# EAGLE board CT_schematic (EAGLE 7.6.0)

Size 100 x 80 mm. Coordinates in mm from the lower left corner, seen from the top.
Outline: 0,0 100,0 100,80 0,80 0,0
Copper layers (1*16): Top 0.035mm / dielectric 1.5mm / Bottom 0.035mm
Design rules "default": minimum track width 10mil, minimum drill 24mil, track to track 8mil, track to pad 8mil, pad to pad 8mil, via to via 8mil, smd to smd 8mil, copper to edge 40mil, drill to drill 8mil, minimum pad ring 10mil, minimum via ring 8mil, stop-mask expansion 4mil, vias tented up to drill 0mil, thermal gap 10mil

## Footprints (pad centres in the part's own frame; a part is rotated, then mirrored left to right if it is on the bottom)
C0603 = smd 0.8 x 0.8: 1 -0.762,0; 2 0.762,0
C0402 = smd 0.5 x 0.5: 1 -0.508,0; 2 0.508,0
C0805 = smd 1.2 x 1.3: 1 -1.016,0; 2 1.016,0
C1206 = smd 1.3 x 1.6: 1 -1.524,0; 2 1.524,0
L0603 = smd 0.8 x 0.8: 1 -0.762,0; 2 0.762,0
L0806 = smd 1.016 x 1.524: 1 -0.889,0; 2 0.889,0
R0603 = smd 0.8 x 0.8: 1 -0.762,0; 2 0.762,0
LQFP144 = smd 0.35 x 1.35: 1 -8.75,-10.625; 2 -8.25,-10.625; 3 -7.75,-10.625; 4 -7.25,-10.625; 5 -6.75,-10.625; 6 -6.25,-10.625; 7 -5.75,-10.625; 8 -5.25,-10.625; 9 -4.75,-10.625; 10 -4.25,-10.625; 11 -3.75,-10.625; 12 -3.25,-10.625; 13 -2.75,-10.62; 14 -2.25,-10.625; 15 -1.75,-10.625; 16 -1.25,-10.625; 17 -0.75,-10.625; 18 -0.25,-10.625; 19 0.25,-10.625; 20 0.75,-10.625; 21 1.25,-10.625; 22 1.75,-10.625; 23 2.25,-10.625; 24 2.75,-10.62; 25 3.25,-10.625; 26 3.75,-10.625; 27 4.25,-10.625; 28 4.75,-10.625; 29 5.25,-10.625; 30 5.75,-10.625; 31 6.25,-10.625; 32 6.75,-10.625; 33 7.25,-10.625; 34 7.75,-10.625; 35 8.25,-10.625; 36 8.75,-10.625; 73 8.75,10.625; 74 8.25,10.625; 75 7.75,10.625; 76 7.25,10.625; 77 6.75,10.625; 78 6.25,10.625; 79 5.75,10.625; 80 5.25,10.625; 81 4.75,10.625; 82 4.25,10.625; 83 3.75,10.625; 84 3.25,10.625; 85 2.75,10.625; 86 2.25,10.625; 87 1.75,10.625; 88 1.25,10.625; 89 0.75,10.625; 90 0.25,10.625; 91 -0.25,10.625; 92 -0.75,10.625; 93 -1.25,10.625; 94 -1.75,10.625; 95 -2.25,10.625; 96 -2.75,10.625; 97 -3.25,10.625; 98 -3.75,10.625; 99 -4.25,10.625; 100 -4.75,10.625; 101 -5.25,10.625; 102 -5.75,10.625; 103 -6.25,10.625; 104 -6.75,10.625; 105 -7.25,10.625; 106 -7.75,10.625; 107 -8.25,10.625; 108 -8.75,10.625 | smd 1.35 x 0.35: 37 10.625,-8.75; 38 10.625,-8.25; 39 10.625,-7.75; 40 10.625,-7.25; 41 10.625,-6.75; 42 10.625,-6.25; 43 10.625,-5.75; 44 10.625,-5.25; 45 10.625,-4.75; 46 10.625,-4.25; 47 10.625,-3.75; 48 10.625,-3.25; 49 10.625,-2.75; 50 10.625,-2.25; 51 10.625,-1.75; 52 10.625,-1.25; 53 10.625,-0.75; 54 10.625,-0.25; 55 10.625,0.25; 56 10.625,0.75; 57 10.625,1.25; 58 10.625,1.75; 59 10.625,2.25; 60 10.625,2.75; 61 10.625,3.25; 62 10.625,3.75; 63 10.625,4.25; 64 10.625,4.75; 65 10.625,5.25; 66 10.625,5.75; 67 10.625,6.25; 68 10.625,6.75; 69 10.625,7.25; 70 10.625,7.75; 71 10.625,8.25; 72 10.625,8.75; 109 -10.625,8.75; 110 -10.625,8.25; 111 -10.625,7.75; 112 -10.625,7.25; 113 -10.625,6.75; 114 -10.625,6.25; 115 -10.625,5.75; 116 -10.625,5.25; 117 -10.625,4.75; 118 -10.625,4.25; 119 -10.625,3.75; 120 -10.625,3.25; 121 -10.625,2.75; 122 -10.625,2.25; 123 -10.625,1.75; 124 -10.625,1.25; 125 -10.625,0.75; 126 -10.625,0.25; 127 -10.625,-0.25; 128 -10.625,-0.75; 129 -10.625,-1.25; 130 -10.625,-1.75; 131 -10.625,-2.25; 132 -10.625,-2.75; 133 -10.625,-3.25; 134 -10.625,-3.75; 135 -10.625,-4.25; 136 -10.625,-4.75; 137 -10.625,-5.25; 138 -10.625,-5.75; 139 -10.625,-6.25; 140 -10.625,-6.75; 141 -10.625,-7.25; 142 -10.625,-7.75; 143 -10.625,-8.25; 144 -10.625,-8.75
ARDUCAM = drill 1 pad 1.8 square: 1 0,0 | drill 1 pad 1.8: 2 0,2.54; 3 2.54,0; 4 2.54,2.54; 5 5.08,0; 6 5.08,2.54; 7 7.62,0; 8 7.62,2.54; 9 10.16,0; 10 10.16,2.54; 11 12.7,0; 12 12.7,2.54; 13 15.24,0; 14 15.24,2.54; 15 17.78,0; 16 17.78,2.54; 17 20.32,0; 18 20.32,2.54; 19 22.86,0; 20 22.86,2.54
DFN-10 = smd 0.965 x 0.305: 1 -1.321,1; 2 -1.321,0.5; 3 -1.321,0; 4 -1.321,-0.5; 5 -1.321,-1; 6 1.321,-1; 7 1.321,-0.5; 8 1.321,0; 9 1.321,0.5; 10 1.321,1
TDFN-8/6MM = smd 0.3 x 0.75: 1 0,0; 2 0.5,0; 3 1,0; 4 1.5,0; 5 1.5,3; 6 1,3; 7 0.5,3; 8 0,3
FCI_10118193-0001LF = smd 0.4 x 1.35: 1 -1.3,2.675; 2 -0.65,2.675; 3 0,2.675; 4 0.65,2.675; 5 1.3,2.675 | smd 1.6 x 1.4: 6 -3.2,2.45; 7 3.2,2.45 | smd 1.9 x 1.9: 8 -1.2,0; 9 1.2,0 | hole 0.5: -3.3,0; 3.3,0
SOT143B = smd 1 x 0.7: 1 -0.75,-1 | smd 0.6 x 0.7: 2 0.95,-1; 3 0.95,1; 4 -0.95,1
ABLS-25.000MHZ-B2F-T = smd 5.6 x 2.8: 1 -3.81,0; 2 5.69,0
ASEK = smd 1.4 x 1: 1 -1.1,-0.8; 2 1.1,-0.8; 3 1.1,0.8; 4 -1.1,0.8
ASFL1 = smd 1.7 x 1.5: 1 -1.27,-1.1; 2 1.27,-1.1; 3 1.27,1.1; 4 -1.27,1.1
TSOT-23-5 = smd 1.3 x 0.62: 1 -1.31,0.95; 2 -1.31,0; 3 -1.31,-0.95; 4 1.31,-0.95; 5 1.31,0.95
DFN8_2X3MC = smd 0.813 x 0.305: 1 -1.398,0.75; 2 -1.398,0.25; 3 -1.398,-0.25; 4 -1.398,-0.75; 5 1.398,-0.75; 6 1.398,-0.25; 7 1.398,0.25; 8 1.398,0.75 | smd 1.753 x 1.549: 9 0,0
JST-2-SMD = smd 1 x 4.6: 1 -1,-3.7; 2 1,-3.7 | smd 1.6 x 3.4: NC1 -3.4,1.5; NC2 3.4,1.5
SON-6 = smd 0.55 x 0.3: 1 -0.355,0.5 | smd 0.52 x 0.3: 2 -0.37,0; 3 -0.37,-0.5; 4 0.37,-0.5; 5 0.37,0; 6 0.37,0.5
SW_4-1437565-2 = smd 1.4 x 2.1: 1 -2.23,4.55; 2 -2.23,-4.55; 3 2.23,4.55; 4 2.23,-4.55
LGM67K-G1J2-24-Z = smd 0.8 x 1.4: A -2,0; C 0,0
NC7SZ125M5X = smd 1.3 x 0.7: 1 -1.3,0.95; 2 -1.3,0; 3 -1.3,-0.95; 4 1.3,-0.95; 5 1.3,0.95

## Placement (x,y rotation side)
C1  1e-06  [C0603]  -50.8,55.88 0 top  (outside the outline)
C2  1e-07  [C0603]  -54.61,55.88 0 top  (outside the outline)
C3  1e-07  [C0603]  -58.42,55.88 0 top  (outside the outline)
C4  1e-07  [C0603]  -62.23,55.88 0 top  (outside the outline)
C5  1e-07  [C0603]  -66.04,55.88 0 top  (outside the outline)
C6  1e-07  [C0603]  -15.24,60.96 0 top  (outside the outline)
C7  1e-07  [C0603]  -19.05,60.96 0 top  (outside the outline)
C8  1e-07  [C0603]  -22.86,60.96 0 top  (outside the outline)
C9  1e-07  [C0603]  -26.67,60.96 0 top  (outside the outline)
C10  1e-07  [C0603]  -30.48,60.96 0 top  (outside the outline)
C11  1e-07  [C0603]  -34.29,60.96 0 top  (outside the outline)
C12  1e-07  [C0603]  -38.1,60.96 0 top  (outside the outline)
C13  1e-07  [C0603]  -41.91,60.96 0 top  (outside the outline)
C14  4.7e-06  [C0603]  -39.37,55.88 0 top  (outside the outline)
C15  2.2e-06  [C0603]  -43.18,55.88 0 top  (outside the outline)
C16  2.2e-06  [C0603]  -46.99,55.88 0 top  (outside the outline)
C17  1e-08  [C0603]  -45.72,60.96 0 top  (outside the outline)
C18  1e-06  [C0603]  -49.53,60.96 0 top  (outside the outline)
C19  1e-07  [C0603]  -53.34,60.96 0 top  (outside the outline)
C20  1e-11  [C0402]  -53.34,66.04 0 top  (outside the outline)
C21  1e-11  [C0402]  -57.15,66.04 0 top  (outside the outline)
C23  1e-06  [C0603]  -57.15,60.96 0 top  (outside the outline)
C24  1e-07  [C0402]  -60.96,66.04 0 top  (outside the outline)
C25  1e-07  [C0402]  -64.77,66.04 0 top  (outside the outline)
C26  1e-06  [C0603]  -60.96,60.96 0 top  (outside the outline)
C27  1e-07  [C0402]  -68.58,66.04 0 top  (outside the outline)
C28  1e-07  [C0402]  -15.24,71.12 0 top  (outside the outline)
C29  1e-08  [C0402]  -19.05,71.12 0 top  (outside the outline)
C30  1e-08  [C0402]  -22.86,71.12 0 top  (outside the outline)
C31  1e-08  [C0402]  -26.67,71.12 0 top  (outside the outline)
C32  1e-05  [C0805]  -34.29,50.8 0 top  (outside the outline)
C33  1e-05  [C0805]  -39.37,50.8 0 top  (outside the outline)
C34  1e-07  [C0402]  -30.48,71.12 0 top  (outside the outline)
C35  1e-05  [C1206]  -59.69,43.18 0 top  (outside the outline)
C36  1e-05  [C1206]  -66.04,43.18 0 top  (outside the outline)
C37  1e-08  [C0402]  -34.29,71.12 0 top  (outside the outline)
C38  1e-08  [C0402]  -38.1,71.12 0 top  (outside the outline)
F1  240.0  [L0603]  -64.77,60.96 0 top  (outside the outline)
I1  1.5e-06  [L0806]  -16.51,50.8 0 top  (outside the outline)
R2  1000.0  [R0603]  -68.58,60.96 0 top  (outside the outline)
R4  4700.0  [R0603]  -15.24,66.04 0 top  (outside the outline)
R5  4700.0  [R0603]  -19.05,66.04 0 top  (outside the outline)
R6  2200.0  [R0603]  -22.86,66.04 0 top  (outside the outline)
R7  2200.0  [R0603]  -26.67,66.04 0 top  (outside the outline)
R8  2200.0  [R0603]  -30.48,66.04 0 top  (outside the outline)
R9  2200.0  [R0603]  -34.29,66.04 0 top  (outside the outline)
R10  10000.0  [R0603]  -15.24,55.88 0 top  (outside the outline)
R11  10000.0  [R0603]  -20.32,55.88 0 top  (outside the outline)
R12  220000.0  [R0603]  -57.15,50.8 0 top  (outside the outline)
R13  1000000.0  [R0603]  -52.07,50.8 0 top  (outside the outline)
R14  10000.0  [R0603]  -25.4,55.88 0 top  (outside the outline)
R15  10000.0  [R0603]  -30.48,55.88 0 top  (outside the outline)
R16  9100.0  [R0603]  -38.1,66.04 0 top  (outside the outline)
R17  680000.0  [R0603]  -62.23,50.8 0 top  (outside the outline)
R18  120000.0  [R0603]  -67.31,50.8 0 top  (outside the outline)
R19  2000.0  [R0603]  -41.91,66.04 0 top  (outside the outline)
R20  10000.0  [R0603]  -35.56,55.88 0 top  (outside the outline)
U1  STM32F446ZET6  [LQFP144]  -24.13,11.43 0 top  (outside the outline)
U2  arducam_ov2640  [ARDUCAM]  -40.64,41.91 0 top  (outside the outline)
U3  MAG3110FCR1  [DFN-10]  -46.99,66.04 0 top  (outside the outline)
U4  24AA01T-I/MNY  [TDFN-8/6MM]  -24.13,26.67 0 top  (outside the outline)
U5  10118193-0001LF  [FCI_10118193-0001LF]  -49.53,26.67 0 top  (outside the outline)
U6  prtr5v0u2ax  [SOT143B]  -50.8,71.12 0 top  (outside the outline)
U7  ABLS-25.000MHZ-B2F-T  [ABLS-25.000MHZ-B2F-T]  -45.72,36.83 0 top  (outside the outline)
U8  ASEK-32.768KHz-ECST  [ASEK]  -29.21,36.83 0 top  (outside the outline)
U9  ASFL1-25MHZ-NCS  [ASFL1]  -40.64,27.94 0 top  (outside the outline)
U10  ltc3406es5  [TSOT-23-5]  -44.45,49.53 0 top  (outside the outline)
U11  MCP73831T-2ACI/MC  [DFN8_2X3MC]  -60.96,69.85 0 top  (outside the outline)
U12  S2B-PH-SM4-TB(LF)(SN)  [JST-2-SMD]  -64.77,6.35 0 top  (outside the outline)
U13  TPS3895ADRYR  [SON-6]  -54.61,69.85 0 top  (outside the outline)
U14  4-1437565-2  [SW_4-1437565-2]  -50.8,6.35 0 top  (outside the outline)
U15  Q65110A2395  [LGM67K-G1J2-24-Z]  -48.26,44.45 0 top  (outside the outline)
U16  nc7sz125m5x  [NC7SZ125M5X]  -21.59,49.53 0 top  (outside the outline)
U17  nc7sz125m5x  [NC7SZ125M5X]  -27.94,49.53 0 top  (outside the outline)

## Library data of the parts
C1-C21 C23-C38 F1 I1 R2 R4-R20 U1-U17 = circuit_tree

## Nets
CLK_CRYSTAL_U1_23: C20.1 U1.23 U7.1
CLK_CRYSTAL_U1_24: C21.1 U1.24 U7.2
CLK_U1_8: U1.8 U8.3
CLK_U2_8: U2.8 U9.3
GND: C1.2 C2.2 C3.2 C4.2 C5.2 C6.2 C7.2 C8.2 C9.2 C10.2 C11.2 C12.2 C13.2 C14.2 C15.2 C16.2 C17.2 C18.2 C19.2 C20.2 C21.2 C23.2 C24.2 C25.2 C26.2 C27.2 C28.2 C29.2 C30.2 C31.2 C32.2 C33.1 C33.2 C34.2 C35.2 C36.2 C37.2 C38.2 R2.2 R10.2 R12.2 R16.2 R18.2 R19.2 U1.16 U1.31 U1.38 U1.51 U1.61 U1.83 U1.94 U1.107 U1.120 U1.130 U2.2 U2.20 U3.5 U3.10 U4.4 U4.7 U5.5 U5.6 U5.7 U5.8 U5.9 U6.1 U8.2 U9.2 U10.2 U11.6 U11.9 U12.2 U13.2 U15.C U16.1 U16.3 U17.1 U17.3
INPUT_USBPOWER_5V: C35.1 R20.2 U5.1 U6.4 U11.1 U11.2
NET_U1_10: R9.1 U1.10 U4.5
NET_U1_11: R8.1 U1.11 U4.6
NET_U1_25: R4.1 U1.25 U16.4
NET_U1_33: C17.1 C18.1 F1.1 U1.32 U1.33
NET_U1_71: C15.1 U1.71
NET_U1_106: C16.1 U1.106
NET_U1_136: R6.1 U1.136 U3.7
NET_U1_137: R7.1 U1.137 U3.6
NET_U1_138: R10.1 U1.138
NET_U1_141: U15.A
NET_U1_142: U14.3 U14.4
NET_U1_143: R11.1 U1.143
NET_U2_19: R5.1 U2.19 U17.4
NET_U3_1: C24.1 U3.1
NET_U3_4: C27.1 U3.4
NET_U10_1: U10.1
NET_U10_3: I1.1 U10.3
NET_U10_5: R12.1 R13.1 U10.5
NET_U10_ATNET_3: I1.2 R13.2
NET_U11_5: R20.1 U11.5
NET_U11_8: R19.1 U11.8
NET_U13_1: R15.1 R16.1 U13.1
NET_U13_3: R17.2 R18.1 U13.3
NET_U13_4: R14.1 U13.4 U16.2 U17.2
NET_U14_1: R2.1 U14.1 U14.2
PROC_DCMI_D0: U1.96 U2.18
PROC_DCMI_D1: U1.97 U2.17
PROC_DCMI_D2: U1.98 U2.16
PROC_DCMI_D3: U1.99 U2.15
PROC_DCMI_D4: U1.3 U2.14
PROC_DCMI_D5: U1.117 U2.13
PROC_DCMI_D6: U1.4 U2.12
PROC_DCMI_D7: U1.5 U2.11
PROC_DCMI_D8: U1.111 U2.10
PROC_DCMI_D9: U1.113 U2.9
PROC_DCMI_HSYNC: U1.40 U2.6
PROC_DCMI_PIXCLK: U1.42 U2.7
PROC_DCMI_VSYNC: U1.124 U2.5
PROC_USB_OTG_FS_DM: U5.2 U6.3
PROC_USB_OTG_FS_DP: U5.3 U6.2
VCC_S1_3V7: C32.1 C36.1 U10.4 U11.3 U11.4 U12.1
VCC_TIER1_3V3: C1.1 C2.1 C3.1 C4.1 C5.1 C6.1 C7.1 C8.1 C9.1 C10.1 C11.1 C12.1 C13.1 C14.1 C19.1 C23.1 C25.1 C26.1 C28.1 C29.1 C30.1 C31.1 C33.2 C34.1 C37.1 C38.1 F1.2 I1.2 R4.2 R5.2 R6.2 R7.2 R8.2 R9.2 R11.2 R13.2 R14.2 R15.2 R17.1 U1.6 U1.17 U1.30 U1.39 U1.52 U1.62 U1.72 U1.84 U1.95 U1.108 U1.121 U1.131 U1.144 U2.1 U3.2 U3.8 U4.8 U8.4 U9.4 U13.6 U16.5 U17.5

## Tracks (layer width: path | path; a pad name or v marks a point on that pad's centre or on a via)
CLK_CRYSTAL_U1_23  (2 unrouted)
CLK_CRYSTAL_U1_24  (2 unrouted)
CLK_U1_8  (1 unrouted)
CLK_U2_8  (1 unrouted)
GND  (77 unrouted)
INPUT_USBPOWER_5V  (5 unrouted)
NET_U1_10  (2 unrouted)
NET_U1_11  (2 unrouted)
NET_U1_25  (2 unrouted)
NET_U1_33  (4 unrouted)
NET_U1_71  (1 unrouted)
NET_U1_106  (1 unrouted)
NET_U1_136  (2 unrouted)
NET_U1_137  (2 unrouted)
NET_U1_138  (1 unrouted)
NET_U1_142  (1 unrouted)
NET_U1_143  (1 unrouted)
NET_U2_19  (2 unrouted)
NET_U3_1  (1 unrouted)
NET_U3_4  (1 unrouted)
NET_U10_3  (1 unrouted)
NET_U10_5  (2 unrouted)
NET_U10_ATNET_3  (1 unrouted)
NET_U11_5  (1 unrouted)
NET_U11_8  (1 unrouted)
NET_U13_1  (2 unrouted)
NET_U13_3  (2 unrouted)
NET_U13_4  (3 unrouted)
NET_U14_1  (2 unrouted)
PROC_DCMI_D0  (1 unrouted)
PROC_DCMI_D1  (1 unrouted)
PROC_DCMI_D2  (1 unrouted)
PROC_DCMI_D3  (1 unrouted)
PROC_DCMI_D4  (1 unrouted)
PROC_DCMI_D5  (1 unrouted)
PROC_DCMI_D6  (1 unrouted)
PROC_DCMI_D7  (1 unrouted)
PROC_DCMI_D8  (1 unrouted)
PROC_DCMI_D9  (1 unrouted)
PROC_DCMI_HSYNC  (1 unrouted)
PROC_DCMI_PIXCLK  (1 unrouted)
PROC_DCMI_VSYNC  (1 unrouted)
PROC_USB_OTG_FS_DM  (1 unrouted)
PROC_USB_OTG_FS_DP  (1 unrouted)
VCC_S1_3V7  (5 unrouted)
VCC_TIER1_3V3  (60 unrouted)